# EAGLE board KELU1-0234 (EAGLE 7.6.0)
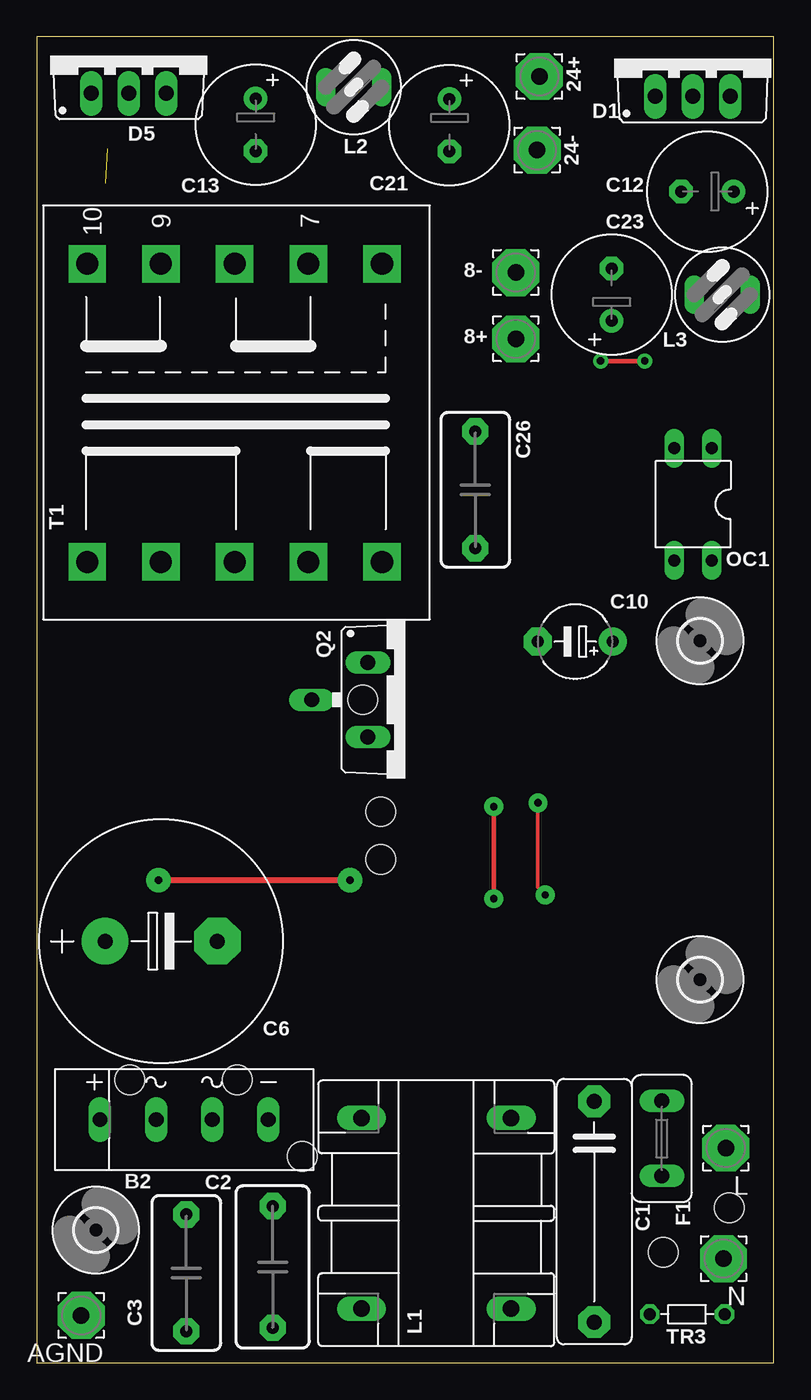
[diagram p0: board, top side]
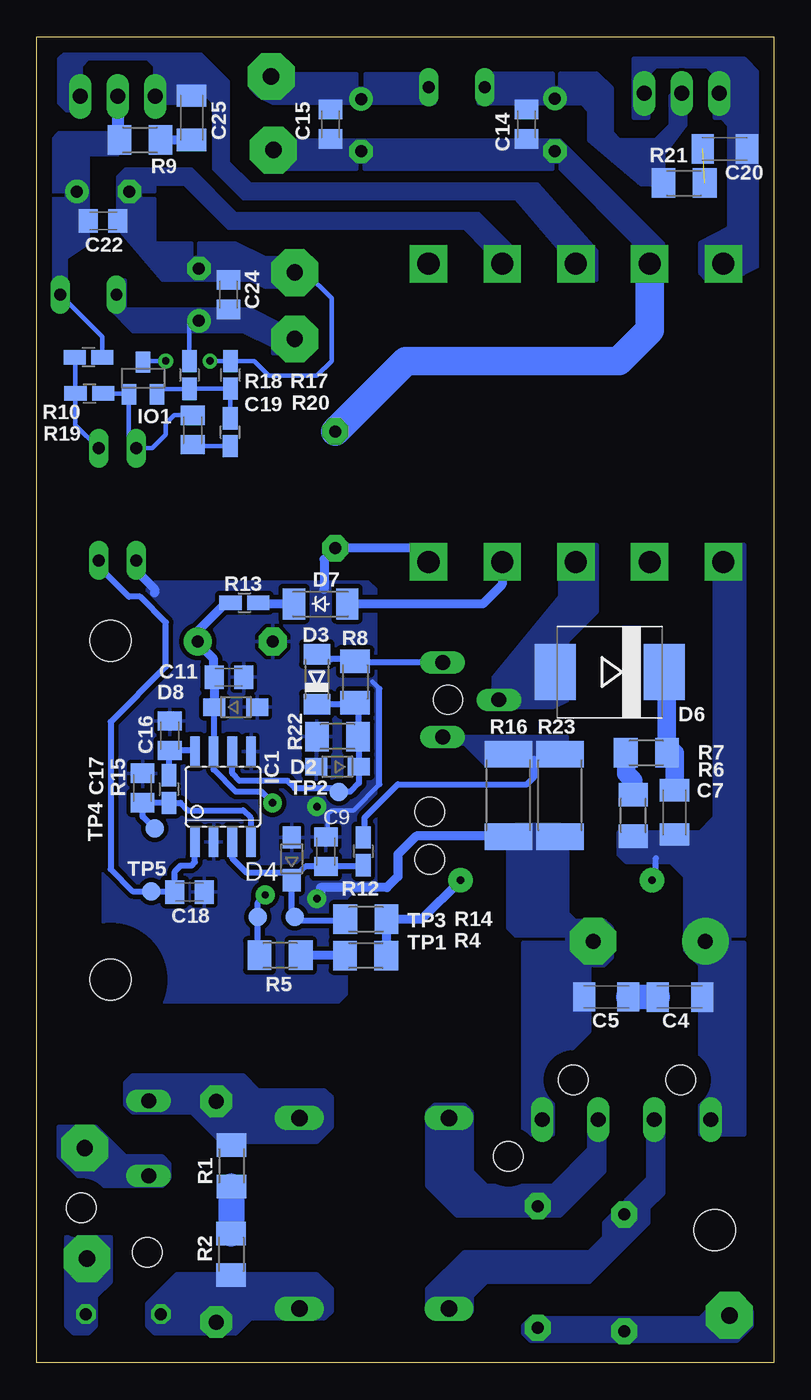
[diagram p1: board, bottom side, seen from below]

Size 50 x 90 mm. Coordinates in mm from the lower left corner, seen from the top.
Outline: 0,0 50,0 50,90 0,90 0,0
Copper layers (1*16): Top 0.035mm / dielectric 1.5mm / Bottom 0.035mm
Design rules "default": minimum track width 10mil, minimum drill 24mil, track to track 8mil, track to pad 8mil, pad to pad 8mil, via to via 8mil, smd to smd 8mil, copper to edge 40mil, drill to drill 8mil, minimum pad ring 10mil, minimum via ring 8mil, stop-mask expansion 4mil, vias tented up to drill 0mil, thermal gap 10mil
Holes 2 mm at 47,10.5 42.5,7.5 18,14 6.3,19.2 13.6,19.2 22.1,45 23.35,37.4 23.35,34.15

## Footprints (pad centres in the part's own frame; a part is rotated, then mirrored left to right if it is on the bottom)
3,17/1,1 = drill 1.118 pad 3.175 octagon: 1 0,0
2KBP = drill 1.016 long: + 5.715,0; - -5.715,0; AC1 -1.905,0; AC2 1.905,0
C15B5 = drill 1.016 pad 2.159 octagon: 1 -7.493,0; 2 7.493,0
C085-110X050 = drill 0.813 pad 1.778 octagon: 1 -4.128,0; 2 4.128,0
C080-110X045 = drill 0.813 pad 1.778 octagon: 1 -3.969,0; 2 3.969,0
C1206K = smd 1.5 x 2: 1 -1.5,0; 2 1.5,0
E7,5-16 = drill 1.016 pad 3.15: + -3.81,0 | drill 1.016 pad 3.15 octagon: - 3.81,0
C0805K = smd 1.3 x 1.6: 1 -1,0; 2 1,0
E5-5 = drill 0.813 pad 1.905: + -2.54,0 | drill 0.813 pad 1.905 octagon: - 2.54,0
E3,5-8 = drill 0.813 pad 1.6: + -1.778,0 | drill 0.813 pad 1.6 octagon: - 1.778,0
TO220ABS = drill 1.016 long: A1 -2.54,-2.54; A2 2.54,-2.54; C 0,-2.54
SOD323-W = smd 1.5 x 1.2: A 1.45,0; C -1.45,0
MINIMELF = smd 1.4 x 1.8: A 1.7,0; C -1.7,0
SMC = smd 2.8 x 3.8: A 3.7,0; C -3.7,0
SOD-123_MINI-SMA = smd 1.5 x 2.1: A 1.8,0; C -1.8,0
TE5 = drill 1.016 long: 1 -2.54,0; 2 2.54,0
2,8 = hole 2.8: 0,0
SOIC08 = smd 0.66 x 2.032: 1 -1.905,-3.073; 2 -0.635,-3.073; 3 0.635,-3.073; 4 1.905,-3.073; 5 1.905,3.073; 6 0.635,3.073; 7 -0.635,3.073; 8 -1.905,3.073
SOT23 = smd 1 x 1.4: 1 -0.95,-1.1; 2 0.95,-1.1; 3 0,1.1
MFE = drill 1.118 long: 1 6.477,-5.08; 2 6.477,5.08; 3 -6.477,5.08; 4 -6.477,-5.08
82114R = drill 0.813 long: 1 0,1.905; 2 0,-1.905
DIL04 = drill 0.813 long: 1 -1.27,-3.81; 2 1.27,-3.81; 3 1.27,3.81; 4 -1.27,3.81
TO220BVH = drill 1.016 long: D 0,-6.35; G -2.54,-2.54; S 2.54,-2.54
M1206 = smd 1.6 x 2: 1 -1.4,0; 2 1.4,0
R0805W = smd 1.5 x 1: 1 -0.94,0; 2 0.94,0
R2512 = smd 1.8 x 3.2: 1 -2.8,0; 2 2.8,0
E25137 = drill 1.5 pad 2.54 square: P$1 -10.15,10.08; P$2 -10.15,5.08; P$3 -10.15,0.08; P$4 -10.15,-4.92; P$5 -10.15,-9.92; P$6 10.1,-9.92; P$7 10.1,-4.92; P$8 10.1,0.08; P$9 10.1,5.08; P$10 10.1,10.08
B1,27 = smd 1.27 x 1.27: PP 0,0
R-5 = drill 0.813 octagon: 1 -2.54,0; 2 2.54,0

## Placement (x,y rotation side)
8+  [3,17/1,1]  32.5,69.5 0 top
8-  [3,17/1,1]  32.5,74 0 top
24+  [3,17/1,1]  34.1,87.31 90 top
24-  [3,17/1,1]  33.95,82.31 90 top
AGND  [3,17/1,1]  3.01,3.21 180 top
B2  [2KBP]  10,16.5 180 top
C1  0.47uF  [C15B5]  37.82,10.25 270 top
C2  3.3nF  [C085-110X050]  16,6.5 90 top
C3  3.3nF  [C080-110X045]  10.14,6.09 270 top
C4  1nF  [C1206K]  6.36,24.82 180 bottom
C5  1nF  [C1206K]  11.36,24.83 180 bottom
C6  70u 400V  [E7,5-16]  8.44,28.61 0 top
C7  270p 1kV  [C1206K]  6.73,37.36 90 bottom
C9  70pF  [C0805K]  30.39,34.68 90 bottom
C10  100uF  [E5-5]  36.53,48.94 180 top
C11  0.1uF  [C0805K]  36.97,46.53 0 bottom
C12  1000u  [E3,5-8]  45.5,79.5 180 top
C13  1000u  [E3,5-8]  14.85,84.03 270 top
C14  0.1u  [C0805K]  16.77,84.07 270 bottom
C15  0.1u  [C0805K]  30.08,84.07 270 bottom
C16  0.1uF  [C0805K]  40.98,42.56 90 bottom
C17  1.4nF  [C0805K]  42.82,39.01 90 bottom
C18  100p  [C0805K]  39.64,31.95 0 bottom
C19  [C0805K]  39.42,63.31 90 bottom
C20  2nF  [C1206K]  3.31,82.39 180 bottom
C21  1000u  [E3,5-8]  28,84 270 top
C22  0.1u  [C0805K]  45.5,77.5 0 bottom
C23  1000u  [E3,5-8]  39,72.5 90 top
C24  0.1u  [C0805K]  37,72.5 90 bottom
C25  2nF  [C1206K]  39.5,84.5 270 bottom
C26  2.2nF 2kV  [C080-110X045]  29.75,59.25 270 top
D1  STPS20H100C  [TO220ABS]  44.5,88.5 0 top
D2  BZX384C18  [SOD323-W]  29.6,40.45 180 bottom
D3  FDLL4148  [MINIMELF]  31,46.4 90 bottom
D4  BZX384C18  [SOD323-W]  32.7,34.2 90 bottom
D5  STPS20H100C  [TO220ABS]  6.24,88.71 0 top
D6  ES3D-E3  [SMC]  11.12,46.88 180 bottom
D7  CGRM4001-G  [SOD-123_MINI-SMA]  30.75,51.5 0 bottom
D8  BZX384C15  [SOD323-W]  36.5,44.5 0 bottom
F1  2A  [TE5]  42.41,15.22 90 top
H5  MOUNT-HOLE2.8  [2,8]  4,9 0 top
H6  MOUNT-HOLE2.8  [2,8]  45,49 0 top
H7  MOUNT-HOLE2.8  [2,8]  45,26 0 top
IC1  UC3844  [SOIC08]  37.37,38.43 0 bottom
IO1  TL431SOT23  [SOT23]  42.79,66.82 0 bottom
L  [3,17/1,1]  46.75,14.56 180 top
L1  1.9mH  [MFE]  27.11,10.14 90 top
L2  4u  [82114R]  21.5,86.58 90 top
L3  4u  [82114R]  46.5,72.5 270 top
N  [3,17/1,1]  46.6,7.06 180 top
OC1  [DIL04]  44.53,58.27 180 top
Q2  IRF740TO220BVH  [TO220BVH]  25,45 270 top
R1  10M  [M1206]  36.79,13.36 90 bottom
R2  10M  [M1206]  36.81,7.36 90 bottom
R4  75k  [M1206]  27.69,27.63 0 bottom
R5  75k  [M1206]  33.49,27.65 0 bottom
R6  55k  [M1206]  9.53,37.14 270 bottom
R7  55k  [M1206]  8.64,41.39 0 bottom
R8  10R  [M1206]  28.4,46.2 90 bottom
R9  35R  [M1206]  43,83 180 bottom
R10  1.2k  [R0805W]  46.5,68.25 180 bottom
R12  1k  [R0805W]  27.85,34.71 270 bottom
R13  10R  [R0805W]  35.92,51.59 0 bottom
R14  1M  [M1206]  27.67,30.09 0 bottom
R15  5.7k  [R0805W]  41.04,38.94 270 bottom
R16  [R2512]  18,38.5 90 bottom
R17  4.76k  [R0805W]  36.86,67.06 90 bottom
R18  23k  [R0805W]  39.65,67.04 270 bottom
R19  NC  [R0805W]  46.44,65.79 0 bottom
R20  [R0805W]  36.88,63.16 90 bottom
R21  35R  [M1206]  6.08,80.07 180 bottom
R22  1K  [M1206]  29.6,42.5 0 bottom
R23  [R2512]  14.5,38.5 90 bottom
T1  E25137  [E25137]  13.5,64.5 90 top
TP1  TPB1,27  [B1,27]  35,30.25 0 bottom
TP2  TPB1,27  [B1,27]  29.5,38.75 0 bottom
TP3  TPB1,27  [B1,27]  32.5,30.25 0 bottom
TP4  TPB1,27  [B1,27]  42,36.25 0 bottom
TP5  TPB1,27  [B1,27]  42.25,32 0 bottom
TR3  NTC10R-3A  [R-5]  44.13,3.29 180 top

## Library data of the parts
8+ 8- 24+ 24- AGND L N = wirepad
B2 = rectifier
C1 = capacitor-wima
C2 C3 C26 = cap-master
C4-C7 C20 C25 R1 R2 R4-R7 R9 R14 R16 R21 R23 = rcl
C9-C19 C21-C24 R8 R10 R12 R13 R15 R17-R20 R22 = resistor
D1 D5-D7 = diode
D2-D4 D8 = diode-1
F1 = fuse
H5-H7 = holes
IC1 = UC3844
IO1 = references; MPN: TL431BFDT; OC_FARNELL: 2095471; PACKAGE: SOT23; SUPPLIER: NXP
L1-L3 = inductors
OC1 = optocoupler
Q2 = transistor-power
T1 = E25137
TP1-TP5 = testpad
TR3 = varistor

## Nets
AGND: B2.- C5.2 C6.- C9.2 C10.- C11.2 C16.2 C17.2 C18.2 C26.2 D2.A D4.A D8.A IC1.2 IC1.5 OC1.3 R16.1 R22.1 R23.1 T1.P$5
GND1: 24-.1 C13.- C14.2 C15.2 C21.- C26.1 T1.P$9
GND2: 8-.1 C12.- C22.2 C23.- C24.2 IO1.3 R17.2 T1.P$7
N$1: F1.1 L.1
N$2: C1.1 F1.2 L1.1 R1.2
N$3: C1.2 L1.4 R2.1 TR3.2
N$4: R1.1 R2.2
N$5: AGND.1 C2.1 C3.2
N$6: N.1 TR3.1
N$7: B2.AC1 C2.2 L1.2
N$8: B2.AC2 C3.1 L1.3
N$9: B2.+ C4.1 C6.+ C7.1 R4.2 R6.2 R14.2 T1.P$1
N$10: C4.2 C5.1
N$11: D6.A Q2.D T1.P$3
N$12: D3.A Q2.G R8.2
N$13: R4.1 R5.2
N$14: D2.C D3.C IC1.6 R8.1 R22.2 TP2.PP
N$15: R6.1 R7.1
N$16: C10.+ C11.1 D8.C IC1.7 R5.1 R13.1 TP1.PP
N$17: C7.2 D6.C R7.2
N$18: C12.+ C22.1 D1.C L3.1 R9.2 R10.1
N$19: Q2.S R12.1 R16.2 R23.2
N$20: D7.C R13.2
N$21: D7.A T1.P$4
N$22: C9.1 D4.C IC1.3 R12.2 R14.1 TP3.PP
N$23: OC1.1 R10.2 R19.1
N$24: C16.1 IC1.8 R15.1
N$25: C17.1 IC1.4 R15.2 TP4.PP
N$26: C20.1 D5.A1 D5.A2 T1.P$10
N$28: C13.+ C14.1 D5.C L2.1 R21.2
N$29: 24+.1 C15.1 C21.+ L2.2
N$30: C18.1 IC1.1 OC1.4 TP5.PP
N$31: IO1.2 R17.1 R18.2 R20.2
N$32: C19.1 R20.1
N$33: C20.2 R21.1
N$34: C19.2 IO1.1 OC1.2 R19.2
N$35: C25.1 D1.A1 D1.A2 T1.P$8
N$36: C25.2 R9.1
N$37: 8+.1 C23.+ C24.1 L3.2 R18.1

## Tracks (layer width: path | path; a pad name or v marks a point on that pad's centre or on a via)
AGND  (via drill 0.5 pad 1.27)
  Top 0.305: v31,31.5 v31,37.75
  Bottom 0.305: C9.2 30.25,35.82 30.25,37.25 30,37.5 28.5,37.5 26.75,39.25 | 26.75,45.75 27.25,46.25 | v31,37.75 31.25,37.75
  Bottom 0.406: 26.75,39.25 26.75,45.75
  Bottom 0.61: OC1.3 43.26,53.76 42,52.5 42,52.25 | 30.5,52.5 30.5,54.53 C26.2 24.35,55.28 T1.P$5 | R16.1 18.05,35.75 24.25,35.75 25.5,34.5 25.5,33 26.25,32.25 30.75,32.25 30.75,31.75 v31,31.5
  pour Bottom (no thermals): 15,15.5 17,15.5 17,28.5 14,28.5 14,29 17.5,29 18,29.5 18,36 17.5,36.5 14.5,36.5 14,35.5 14,30.5 13.5,30 11.5,30 11,29.5 11,27.5 11.5,27 12.5,27 12.5,22.5 15,20
  pour Bottom (isolate 0.305): 27.5,53 42,53 42.5,52.5 42.5,46.5 44,45 45.25,45 45.5,44.75 45.5,28.75 45.25,28.5 44,28.5 42,26.5 42,25 41.5,24.5 29.5,24.5 29,25 29,31.5 28.5,32 27,32 27,52.5
GND1
  Bottom 1.93: C26.1 24.97,68 10.5,68 8.42,70.08 T1.P$9
  pour Bottom (no thermals): 7.5,73.5 7.5,76 14.5,83 34.5,83 35,82.5 35,81.5 34.5,81 28.3,81 28.3,81.5 27.8,81.5 27.8,81 15,81 15,81.5 14.5,81.5 14.5,81 9.5,76 9.5,73.5
GND2  (via drill 0.5 pad 1.02)
  Top 0.305: v38.25,68 v41.25,68
  Bottom 0.305: 8-.1 31.75,74 30,72.25 30,68 31,67 34.25,67 35.25,68 R17.2 v38.25,68 | v41.25,68 42.71,68 arc-90 IO1.3
  pour Bottom (no thermals): 17.5,75.5 17.5,73.5 19.5,73.5 19.5,75.5 21,77 37,77 40,80 42,80 42,79.5 43,79.5 43,79 42,79 42,76 39.5,76 39.5,75 39,75 39,76 36.5,76 34.5,75 31.5,75 31.5,73 34.5,73 35.5,73.5 41.5,73.5 44.5,77 44.5,80.5 44,81 39.5,81 36.5,78 20,78
N$1
  pour Bottom (no thermals): 41.5,12 46.5,12 48.5,14 48.5,16 46,16 44,14 41.5,14 41,13.5 41,12.5
N$2
  pour Bottom (no thermals): 44,17.5 43.5,17 39.5,17 37.5,15 31,15 30,16 30,18 30.5,18.5 35,18.5 36,19.5 43.5,19.5 44,19
N$3
  pour Bottom (no thermals): 31,6 40.5,6 42.5,4 42.5,2.5 42,2 36.5,2 35.5,3 30.5,3 30,3.5 30,5
N$4
  Bottom 1.778: R1.1 36.81,11.96 R2.2
N$5
  pour Bottom (no thermals): 17,2.5 16.5,3 5,3 3.5,4.5 2.5,4.5 1.5,3.5 1.5,2.5 2.5,1.5 16.5,1.5 17,2
N$6
  pour Bottom (no thermals): 48,3 48,8.5 45,8.5 45,5.5 46,4.5 46,2.5 46.5,2 47.5,2 48,2.5
N$7
  pour Bottom (no thermals): 20.5,17 20.5,13 19.5,12 15,12 12.5,14.5 12.5,17 11.5,17 11.5,13 14.5,10 21.5,10 23.5,12 23.5,17 23,17.5 21,17.5
N$8
  pour Bottom (no thermals): 8.5,17 8.5,12.5 11.5,9.5 11.5,8.5 12.5,7.5 21,7.5 23.5,5 23.5,3.5 23,3 21,3 20.5,3.5 20.5,4.5 19.5,5.5 12.5,5.5 8.5,9.5 8.5,10.5 7.5,11.5 7.5,17
N$9  (via drill 0.5 pad 1.68)
  Top 0.406: v21.25,32.75 v8.25,32.75
  Bottom 0.406: v8.25,32.75 8,33 8,34.25
  Bottom 0.61: R4.2 26.29,30.07 R14.2 23.91,30.09 v21.25,32.75
  pour Bottom (no thermals): 5,15.5 2,15.5 2,28.5 3,28.5 3,29 2,29 2,55.5 4,55.5 4,37 5,36 10.5,36 10.5,34.5 10,34 7,34 6,33 6,28 5,27
N$10
  Bottom 1.676: C4.2 C5.1
N$11
  pour Bottom (no thermals): 12,55.5 12,51 14,49 14,45 15,44.5 19,44.5 19,46.5 14.5,52 14.5,55.5
N$12
  Bottom 0.406: Q2.G 28.34,47.54 arc90 R8.2 28.55,47.75 30,47.75 arc39 D3.A
N$13
  Bottom 0.61: R4.1 29.11,27.65 R5.2
N$14
  Bottom 0.406: 28.4,44.7 D3.C 31.05,44.75 | 28.4,44.7 R8.1 | 28.4,44.7 28.2,44.7 R22.2 28.15,42.5 D2.C 28.15,39.35 28.75,38.75 TP2.PP 29.75,39 32.5,39 33,39.5 36.25,39.5 36.73,39.98 IC1.6
N$15
  Bottom 1.27: R7.1 10,41.39 10,40 9.53,39.53 R6.1
N$16  (via drill 0.5 pad 1.27)
  Top 0.254: v34.5,31.75 34,32.25 v34,38
  Bottom 0.406: R5.1 35,27.76 TP1.PP 35,31.25 v34.5,31.75 | v34,38 34.75,38.75 36.5,38.75 38.01,40.26 IC1.7 38.01,44.45 D8.C
  Bottom 0.61: R13.1 37.16,51.59 39.07,49.68 C10.+ 39.07,48.82 38,47.75 38,46.56 C11.1 37.95,46.51 D8.C
N$17
  Bottom 1.27: 7.74,46.56 7.24,46.56 R7.2 6.73,41.39 C7.2
  Bottom 1.676: D6.C 7.74,46.56
N$18
  Bottom 0.305: L3.1 45.56,69.66 R10.1
  Bottom 0.813: D1.C 44.5,83.5 44.4,83.4 R9.2
  pour Bottom (no thermals): 44,83.5 48.5,83.5 49,83 49,79.5 48,79.5 48,79 49,79 49,71.5 48,71.5 48,75 46.5,76 46.5,82 44.5,82 44,82.5
N$19
  Bottom 0.406: R12.1 27.75,35.75 27.75,37 25.5,39.25 16.75,39.25 16.25,39.75 16.25,41
  pour Bottom (no thermals): 14,42.5 21,42.5 21.5,43 23.5,43 23.5,42 21,42 19.5,40.5 14,40.5
N$20
  Bottom 0.61: D7.C 34.89,51.5 R13.2
N$21
  Bottom 0.61: T1.P$4 18.42,52.83 19.75,51.5 D7.A
N$22
  Bottom 0.406: R12.2 27.94,33.68 C9.1 31.77,33.68 D4.C | D4.C 32.7,30.45 TP3.PP arc-90 32.25,30 29.16,30 R14.1 | D4.C 33.2,33.25 35.75,33.25 36.73,34.23 IC1.3
N$23
  Bottom 0.305: OC1.1 47.38,63.66 R19.1 47.38,68.19 R10.2
N$24
  Bottom 0.406: IC1.8 39.33,41.56 C16.1 41.04,41.5 R15.1
N$25
  Bottom 0.406: IC1.4 35.5,35.39 35.5,37 36,37.5 39.75,37.5 40.25,38 R15.2 C17.1 42.82,37.07 TP4.PP
N$26
  pour Bottom (no thermals): 2,88.5 9.5,88.5 9.5,84.5 8.5,84.5 8.5,87.5 8,88 4.5,88 4,87.5 4,84.5 3.5,84.5 3,84 3,77 5,76 5,74 4.5,73.5 3,73.5 1,74.5 1,87.5
N$28
  pour Bottom (no thermals): 7.5,82 7.5,80 9,80 12.5,83 12.5,85 13,85.5 20,85.5 20,87.5 15,87.5 15,86.5 14.5,86.5 14.5,87.5 12,87.5 11,86.5 11,83.5 10.5,83 8,83 7,84 7,86 6,86 6,84
N$29
  pour Bottom (no thermals): 23,87.5 27.7,87.5 27.7,86.5 28.3,86.5 28.3,87.5 32.5,87.5 33.5,88.5 35,88.5 35.5,88 35.5,86.5 35,86 34,85.5 23,85.5
N$30
  Bottom 0.406: IC1.1 39.27,33.98 39.5,33.75 40.25,33.75 40.64,33.36 C18.1 40.69,32 TP5.PP 43.5,32 45,33.5 45,43.5 41.25,47.25 41.25,50.25 43,52 43.75,52 45.8,54.05 OC1.4
N$31
  Bottom 0.305: R20.2 36.86,64.1 R17.1 39.65,66.12 R18.2 41.84,66.1 IO1.2
N$32
  Bottom 0.305: R20.1 39.42,62.22 C19.1
N$33  (1 unrouted)
N$34
  Bottom 0.305: C19.2 40.69,64.31 41.25,63.75 41.25,63 42.17,62.08 OC1.2 43.75,62.57 IO1.1 43.81,65.79 R19.2
N$35
  pour Bottom (no thermals): 12,73.5 12,75.5 16,80 35.5,80 37,81.5 37,87 39,89 48,89 48.5,88.5 48.5,85.5 48,85 47,85 47,88 46.5,88.5 42.5,88.5 42,88 42,86 41.5,85.5 40,85.5 39.5,86 38.5,86 38,85.5 38,81 36,79 17.5,79 14.5,75.5 14.5,74 14,73.5
N$36
  Bottom 0.61: C25.2 R9.1
N$37
  Bottom 0.305: C23.+ 39.65,70.72 R18.1
  pour Bottom (no thermals): 32,70.5 31.5,70 31.5,68.5 34,68.5 34,69 36,70 43.5,70 45,71.5 45,73.5 44,73.5 44,71.5 35.5,71.5 33.5,70.5